# EAGLE board main (EAGLE 9.0.0)

Size 160 x 100 mm. Coordinates in mm from the lower left corner, seen from the top.
Outline: 0,0 160,0 160,100 0,100 0,0
Copper layers (1*16): Top 0.035mm / dielectric 1.5mm / Bottom 0.035mm
Design rules "default": minimum track width 6mil, minimum drill 0.35mm, track to track 6mil, track to pad 6mil, pad to pad 6mil, via to via 6mil, smd to smd 6mil, copper to edge 40mil, drill to drill 6mil, minimum pad ring 10mil, minimum via ring 8mil, stop-mask expansion 4mil, vias tented up to drill 0mil, thermal gap 10mil

## Footprints (pad centres in the part's own frame; a part is rotated, then mirrored left to right if it is on the bottom)
C0603 = smd 1.1 x 1: 1 -0.85,0; 2 0.85,0
HC49U-V = drill 0.813: 1 -2.413,0; 2 2.413,0
DIL08S = drill 0.813: 1 -3.81,-3.81; 4 3.81,-3.81; 5 3.81,3.81; 8 -3.81,3.81
MA06-1 = drill 1.016 long: 1 -6.35,0; 2 -3.81,0; 3 -1.27,0; 4 1.27,0; 5 3.81,0; 6 6.35,0
SOP65P640X120-16N = smd 1.473 x 0.356: 1 -2.819,2.286; 2 -2.819,1.626; 3 -2.819,0.965; 4 -2.819,0.33; 5 -2.819,-0.33; 6 -2.819,-0.965; 7 -2.819,-1.626; 8 -2.819,-2.286; 9 2.819,-2.286; 10 2.819,-1.626; 11 2.819,-0.965; 12 2.819,-0.33; 13 2.819,0.33; 14 2.819,0.965; 15 2.819,1.626; 16 2.819,2.286
QFP80P1200X1200X120-44N = smd 1.473 x 0.508: 1 -5.74,3.988; 2 -5.74,3.2; 3 -5.74,2.388; 4 -5.74,1.6; 5 -5.74,0.787; 6 -5.74,0; 7 -5.74,-0.787; 8 -5.74,-1.6; 9 -5.74,-2.388; 10 -5.74,-3.2; 11 -5.74,-3.988; 23 5.74,-3.988; 24 5.74,-3.2; 25 5.74,-2.388; 26 5.74,-1.6; 27 5.74,-0.787; 28 5.74,0; 29 5.74,0.787; 30 5.74,1.6; 31 5.74,2.388; 32 5.74,3.2; 33 5.74,3.988 | smd 0.508 x 1.473: 12 -3.988,-5.74; 13 -3.2,-5.74; 14 -2.388,-5.74; 15 -1.6,-5.74; 16 -0.787,-5.74; 17 0,-5.74; 18 0.787,-5.74; 19 1.6,-5.74; 20 2.388,-5.74; 21 3.2,-5.74; 22 3.988,-5.74; 34 3.988,5.74; 35 3.2,5.74; 36 2.388,5.74; 37 1.6,5.74; 38 0.787,5.74; 39 0,5.74; 40 -0.787,5.74; 41 -1.6,5.74; 42 -2.388,5.74; 43 -3.2,5.74; 44 -3.988,5.74
32005-201 = smd 3.1 x 0.5: 1 3,1.6; 2 3,0.8; 3 3,0; 4 3,-0.8; 5 3,-1.6 | smd 2.5 x 2: M1 -3,-4.45; M2 -3,4.45 | smd 3.3 x 2: M3 2.9,4.45; M4 2.9,-4.45 | hole 0.9: 0,2.2; 0,-2.2

## Placement (x,y rotation side)
C1  100n  [C0603]  -34.29,55.88 0 top  (outside the outline)
C2  100n  [C0603]  -40.64,55.88 0 top  (outside the outline)
C3  100n  [C0603]  -46.99,55.88 0 top  (outside the outline)
C4  100n  [C0603]  -53.34,55.88 0 top  (outside the outline)
C5  10p  [C0603]  -16.51,63.5 0 top  (outside the outline)
C6  10p  [C0603]  -21.59,63.5 0 top  (outside the outline)
Q1  16MHz  [HC49U-V]  -39.37,45.72 0 top  (outside the outline)
QG1  40MHz  [DIL08S]  -20.32,31.75 0 top  (outside the outline)
SV1  [MA06-1]  -21.59,57.15 0 top  (outside the outline)
U1  AD5932YRUZ  [SOP65P640X120-16N]  -29.21,46.99 0 top  (outside the outline)
U2  ATMEGA32U4-AU  [QFP80P1200X1200X120-44N]  -35.56,11.43 0 top  (outside the outline)
X1  MINI-USB-32005-201  [32005-201]  -40.64,33.02 0 top  (outside the outline)

## Library data of the parts
C1-C6 = rcl; SPICEPREFIX: C
Q1 = crystal; OC_FARNELL: 1666969; OC_NEWARK: unknown
QG1 = crystal; OC_FARNELL: unknown; OC_NEWARK: unknown
SV1 = con-lstb; OC_FARNELL: unknown; OC_NEWARK: unknown
U1 = Analog Devices_By_element14_Batch_1; MPN: AD5932YRUZ; OC_FARNELL: 1274251; OC_NEWARK: 19M0844; PACKAGE: TSSOP-16; SUPPLIER: Analog Devices
U2 = Atmel_By_element14_Batch_1-00; MPN: ATMEGA32U4-AU; OC_FARNELL: 1748525; OC_NEWARK: 26R5633; PACKAGE: TQFP-44; SUPPLIER: Atmel
X1 = con-cypressindustries; OC_FARNELL: unknown; OC_NEWARK: unknown

## Nets
GND: C1.2 C2.2 C3.2 C4.2 C5.2 C6.2 QG1.4 SV1.1 U1.5 U1.15 U2.5 U2.15 U2.23 U2.35 U2.43
MISO: SV1.2
MOSI: SV1.3
N$1: QG1.5 U1.6
N$4: C5.1 Q1.1 U2.16
RESET: SV1.4
SCK: SV1.5
UCAP: U2.6
VCC: C1.1 C2.1 C3.1 C4.1 QG1.8 SV1.6 U1.2 U1.3 U2.2 U2.14 U2.24 U2.34 U2.44
XTAL1: C6.1 Q1.2 U2.17

## Tracks (layer width: path | path; a pad name or v marks a point on that pad's centre or on a via)
GND  (14 unrouted)
N$1  (1 unrouted)
N$4  (2 unrouted)
VCC  (12 unrouted)
XTAL1  (2 unrouted)